# EAGLE board v1 (EAGLE 6.5.0)
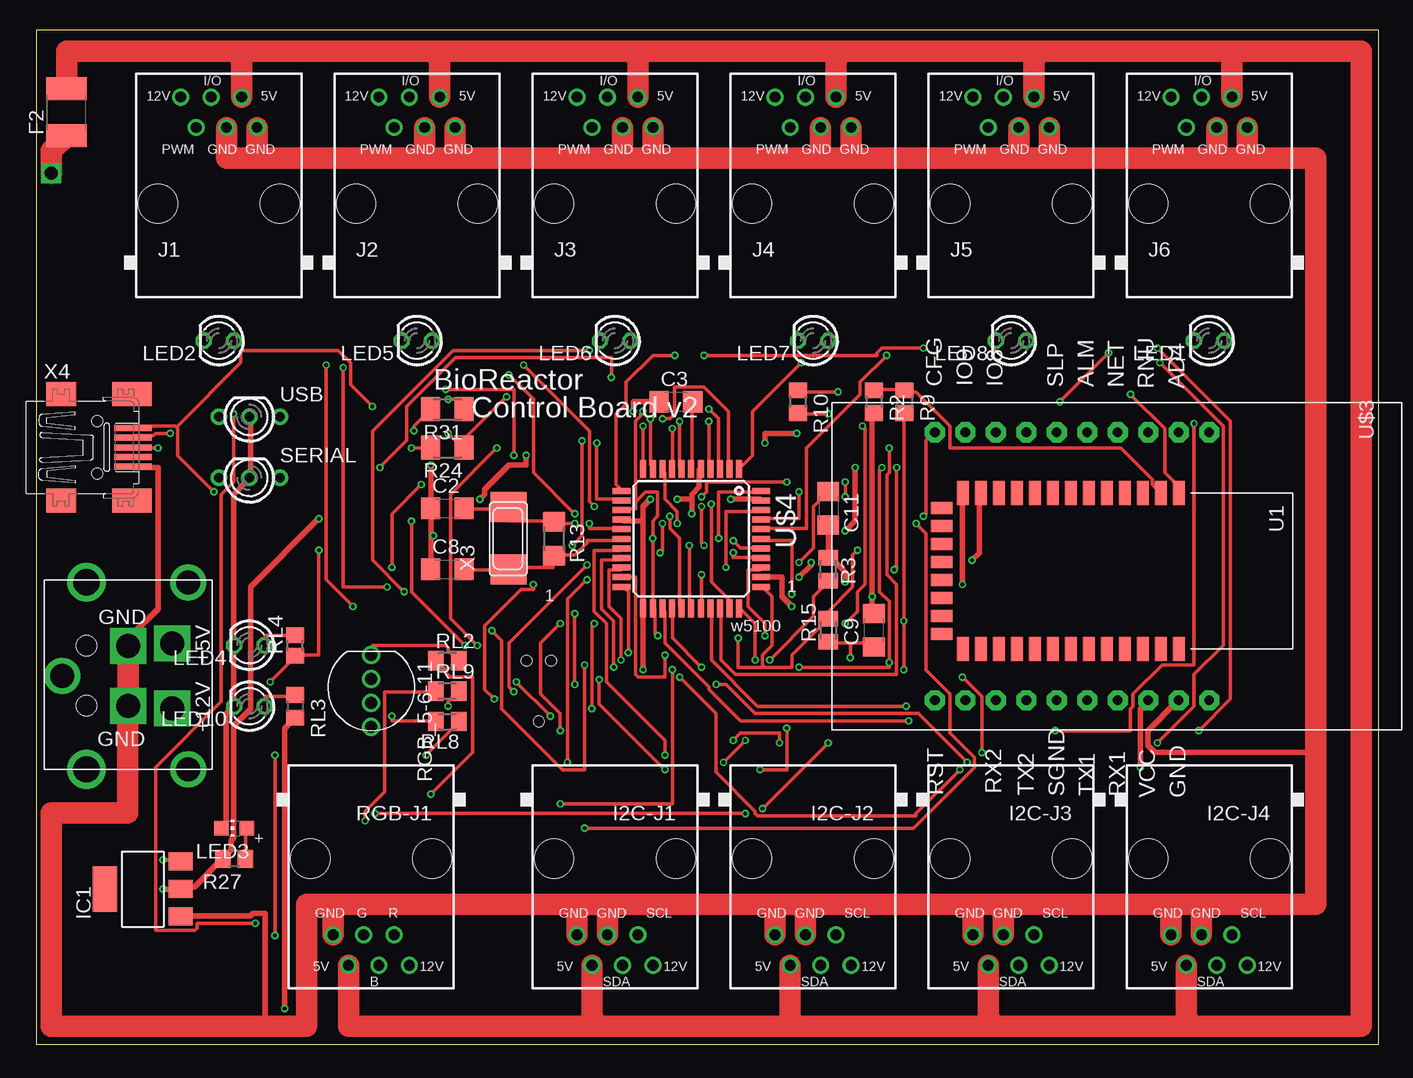
[diagram p0: board, top side]
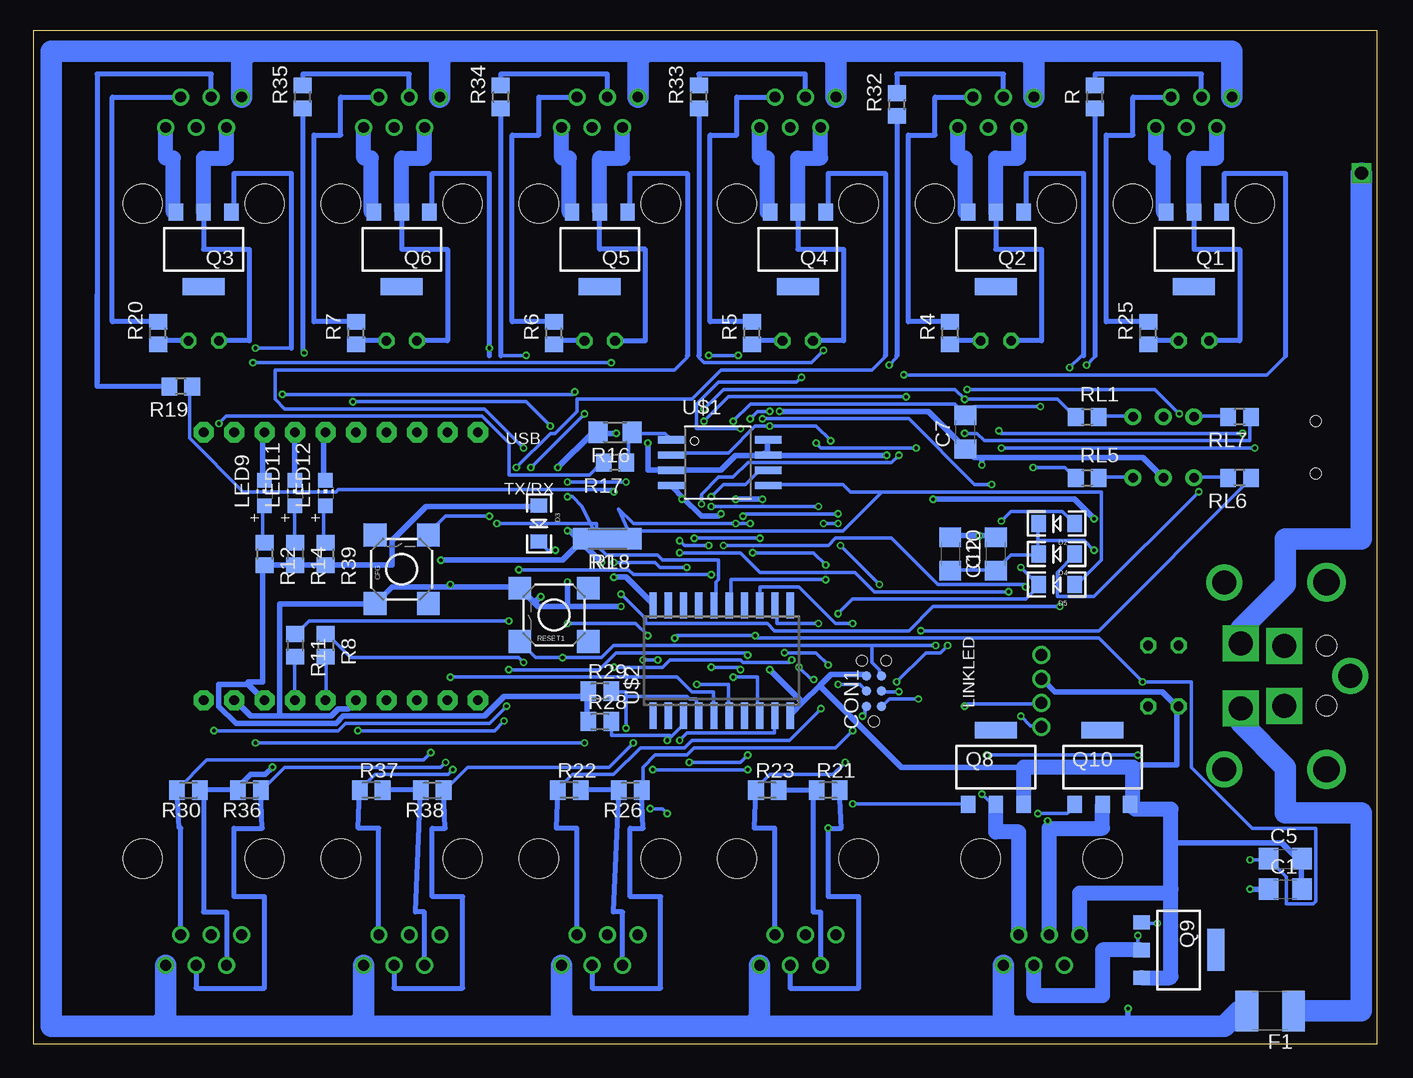
[diagram p1: board, bottom side, seen from below]

Size 111.94 x 84.57 mm. Coordinates in mm from the lower left corner, seen from the top.
Outline: 0,0 111.94,0 111.94,84.57 0,84.57 0,0
Copper layers (1*16): Top 0.035mm / dielectric 1.5mm / Bottom 0.035mm
Design rules "Fusion_eagle_rule_v1.1": minimum track width 6mil, minimum drill 12mil, track to track 6mil, track to pad 6mil, pad to pad 6mil, via to via 6mil, smd to smd 0mil, copper to edge 10mil, drill to drill 10mil, minimum pad ring 10mil, minimum via ring 6mil, stop-mask expansion 2mil, vias tented up to drill 100mil, thermal gap 10mil
Net classes: 0 default: width 0.305 mm; 1 power: width 0.457 mm; 2 VIN: width 0.457 mm; 3 fine: width 0.305 mm; 4 aref: width 0.305 mm
bKeepout: area -1.3,57.4 to 114.3,85.3; area -7.6,54.9 to 108,82.8
tRestrict: area -6.3,58.7 to 116.8,85.3; area 22.9,-4.8 to 118.1,16.8
bRestrict: area -6.3,58.7 to 116.8,85.3; area 22.9,-4.8 to 118.1,16.8
vRestrict: area 47,34.5 to 62.2,38.4; area 47,35.8 to 50.8,49.8; area 58.4,37.1 to 62.2,49.8; area 47,46 to 62.2,49.8; area 47,25.7 to 62.2,29.5

## Footprints (pad centres in the part's own frame; a part is rotated, then mirrored left to right if it is on the bottom)
C1206 = smd 1.6 x 1.8: 1 -1.4,0; 2 1.4,0
TACTILE_SWITCH_SMD = smd 1.905 x 1.905: 1 -2.857,2.223; 2 2.857,2.223; 3 -2.857,-2.223; 4 2.857,-2.223
TC2030-MCP-NL = smd 0.787 x 0.787: 5V 1.27,0.635; GND 3.81,0.635; MISO 1.27,-0.635; MOSI 2.54,0.635; RESET 3.81,-0.635; SCK 2.54,-0.635 | hole 0.889: 0,0; 5.08,-1.016; 5.08,1.016
LED-1206 = smd 1.2 x 1.4: A -1.5,0; C 1.5,0
C1812 = smd 1.9 x 3.4: 1 -1.95,0; 2 1.95,0
RJ12-STRAIGHT-I2C = drill 0.9 pad 1.4: +5V 1.905,8.89; +12V -3.175,8.89; GND1 3.175,6.35; GND2 0.635,6.35; SCL -1.905,6.35; SDA -0.635,8.89 | hole 3.251: -5.08,0; 5.08,0
SOT223 = smd 1.499 x 2.007: 1 -2.261,-3.15; 2 0.025,-3.15; 3 2.311,-3.15 | smd 3.81 x 2.007: 4 0,3.15
RJ12-STRAIGHT = drill 0.9 pad 1.4: +5V 1.905,8.89; +12V -3.175,8.89; GND1 3.175,6.35; GND2 0.635,6.35; I/O -0.635,8.89; PWM -1.905,6.35 | hole 3.251: -5.08,0; 5.08,0
LED3MM = drill 0.813 octagon: A -1.27,0; K 1.27,0
CHIP-LED0805 = smd 1.2 x 1.2: A 0,-1.05; C 0,1.05
PG-SOT-223 = smd 1.2 x 1.4: 1 -2.311,-3.099; 2 0,-3.099; 3 2.311,-3.099 | smd 3.5 x 1.4: 4 0,3.099
R0805 = smd 1.3 x 1.5: 1 -0.95,0; 2 0.95,0
R1206 = smd 1.6 x 1.803: 1 -1.422,0; 2 1.422,0
M0805 = smd 1.3 x 1.6: 1 -0.95,0; 2 0.95,0
M1206 = smd 1.6 x 2: 1 -1.4,0; 2 1.4,0
RJ12-STRAIGHT-RGB = drill 0.9 pad 1.4: +5V 1.905,8.89; +12V -3.175,8.89; B -0.635,8.89; G 0.635,6.35; GND1 3.175,6.35; R -1.905,6.35 | hole 3.251: -5.08,0; 5.08,0
LED-TRICOLOR-THROUGHHOLE = drill 1: BLU 3,0; GND -1,0; GRN 1,0; RED -3,0
R0805' = smd 1.3 x 1.5: 1 -0.85,0; 2 0.85,0
BICOLOR-3MM = drill 0.8 pad 1.4: 1 -2.54,0; 2 0,0; 3 2.54,0
BLUETOOTH_SMD = smd 2 x 1: 1 -6.35,3.81; 2 -6.35,2.31; 3 -6.35,0.81; 4 -6.35,-0.69; 5 -6.35,-2.19; 6 -6.35,-3.69; 7 -6.35,-5.19; 8 -6.35,-6.69; 9 -6.35,-8.19; 10 -6.35,-9.69; 11 -6.35,-11.19; 12 -6.35,-12.69; 13 -6.35,-14.19; 22 6.65,-14.19; 23 6.65,-12.69; 24 6.65,-11.19; 25 6.65,-9.69; 26 6.65,-8.19; 27 6.65,-6.69; 28 6.65,-5.19; 29 6.65,-3.69; 30 6.65,-2.19; 31 6.65,-0.69; 32 6.65,0.81; 33 6.65,2.31; 34 6.65,3.81 | smd 1 x 1.8: 14 -5.1,-15.94; 15 -3.6,-15.94; 16 -2.1,-15.94; 17 -0.6,-15.94; 18 0.9,-15.94; 19 2.4,-15.94; 20 3.9,-15.94; 21 5.4,-15.94
SOIC_8-LEAD = smd 0.61 x 2.21: CE -1.905,-2.934; RST/HOLD -0.635,5.156; SCK 0.635,5.156; SI 1.905,5.156; SO -0.635,-2.934; VDD -1.905,5.156; VSS 1.905,-2.934; WP 0.635,-2.934
SO20W = smd 0.6 x 2.2: 1 -5.715,-4.6; 2 -4.445,-4.6; 3 -3.175,-4.6; 4 -1.905,-4.6; 5 -0.635,-4.6; 6 0.635,-4.6; 7 1.905,-4.6; 8 3.175,-4.6; 9 4.445,-4.6; 10 5.715,-4.6; 11 5.715,4.6; 12 4.445,4.6; 13 3.175,4.6; 14 1.905,4.6; 15 0.635,4.6; 16 -0.635,4.6; 17 -1.905,4.6; 18 -3.175,4.6; 19 -4.445,4.6; 20 -5.715,4.6
SZ05-ZIGBEE = drill 0.8 pad 1.676 octagon: 6 -11.415,13.971; 7 -11.415,11.431; 11 -11.415,1.271; 12 -11.415,-1.269; 13 -11.415,-3.809; 14 -11.415,-6.349; 17 10.925,-6.349; 18 10.925,-3.809; 19 10.925,-1.269; 25 10.925,13.971; ALM -11.415,3.811; CFG -11.415,-8.889; GND 10.925,11.431; NET -11.415,6.351; RNU -11.415,8.891; RST 10.925,-8.889; RX1 10.925,6.351; SGND 10.925,1.271; TX1 10.925,3.811; VCC 10.925,8.891
TQFP44 = smd 1.5 x 0.5: 1 -5.8,4; 2 -5.8,3.2; 3 -5.8,2.4; 4 -5.8,1.6; 5 -5.8,0.8; 6 -5.8,0; 7 -5.8,-0.8; 8 -5.8,-1.6; 9 -5.8,-2.4; 10 -5.8,-3.2; 11 -5.8,-4; 23 5.8,-4; 24 5.8,-3.2; 25 5.8,-2.4; 26 5.8,-1.6; 27 5.8,-0.8; 28 5.8,0; 29 5.8,0.8; 30 5.8,1.6; 31 5.8,2.4; 32 5.8,3.2; 33 5.8,4 | smd 0.5 x 1.5: 12 -4,-5.8; 13 -3.2,-5.8; 14 -2.4,-5.8; 15 -1.6,-5.8; 16 -0.8,-5.8; 17 0,-5.8; 18 0.8,-5.8; 19 1.6,-5.8; 20 2.4,-5.8; 21 3.2,-5.8; 22 4,-5.8; 34 4,5.8; 35 3.2,5.8; 36 2.4,5.8; 37 1.6,5.8; 38 0.8,5.8; 39 0,5.8; 40 -0.8,5.8; 41 -1.6,5.8; 42 -2.4,5.8; 43 -3.2,5.8; 44 -4,5.8
KPJX-4S-S = drill 2 square: +5V 2.7,1.35; +12V -2.7,1.35; GND1 -2.5,5; GND2 2.5,5 | drill 2: P$1 -7.8,0; P$2 7.8,0; P$11 0,10.5 | drill 2.2: P$3 -7.8,8.5; P$4 7.8,8.5 | hole 1.7: -2.5,8.5; 2.5,8.5
NX6035 = smd 2.5 x 3: P$1 2.665,0; P$2 -2.565,0
32005-201 = smd 3.1 x 0.5: 1 3,1.6; 2 3,0.8; 3 3,0; 4 3,-0.8; 5 3,-1.6 | smd 2.5 x 2: M1 -3,-4.45; M2 -3,4.45 | smd 3.3 x 2: M3 2.9,4.45; M4 2.9,-4.45 | hole 0.9: 0,2.2; 0,-2.2

## Placement (x,y rotation side)
C1  10uF  [C1206]  7.62,12.95 0 bottom
C2  22pF  [C1206]  34.29,44.7 0 top
C3  100nF  [C1206]  53.34,53.59 0 top
C5  10uF  [C1206]  7.62,15.49 0 bottom
C7  10uF  [C1206]  34.29,51.05 90 bottom
C8  22pF  [C1206]  34.29,39.62 0 top
C9  100nF  [C1206]  69.85,34.54 90 top
C10  10uF  [C1206]  31.75,40.89 90 bottom
C11  100nF  [C1206]  66.04,44.7 270 top
C12  100nF  [C1206]  35.56,40.89 270 bottom
CFG  Configure  [TACTILE_SWITCH_SMD]  81.28,39.62 90 bottom
CON1  SPI  [TC2030-MCP-NL]  41.91,26.92 90 bottom
D2  1N581D1206  [LED-1206]  26.67,43.43 180 bottom
D3  1N581D1206  [LED-1206]  69.85,43.43 270 bottom
D4  1N581D1206  [LED-1206]  26.67,40.89 180 bottom
D5  1N581D1206  [LED-1206]  26.67,38.35 180 bottom
F1  0.5A  [C1812]  8.89,2.79 180 bottom
F2  0.5A  [C1812]  2.54,77.72 90 top
I2C-J1  RJ12STRAIGHT-I2C  [RJ12-STRAIGHT-I2C]  48.26,15.49 180 top
I2C-J2  RJ12STRAIGHT-I2C  [RJ12-STRAIGHT-I2C]  64.77,15.49 180 top
I2C-J3  RJ12STRAIGHT-I2C  [RJ12-STRAIGHT-I2C]  81.28,15.49 180 top
I2C-J4  RJ12STRAIGHT-I2C  [RJ12-STRAIGHT-I2C]  97.79,15.49 180 top
IC1  REG1117  [SOT223]  8.89,12.95 90 top
J1  RJ12  [RJ12-STRAIGHT]  15.24,70.1 0 top
J2  RJ12  [RJ12-STRAIGHT]  31.75,70.1 0 top
J3  RJ12  [RJ12-STRAIGHT]  48.26,70.1 0 top
J4  RJ12  [RJ12-STRAIGHT]  64.77,70.1 0 top
J5  RJ12  [RJ12-STRAIGHT]  81.28,70.1 0 top
J6  RJ12  [RJ12-STRAIGHT]  97.79,70.1 0 top
LED1  Blue  [LED3MM]  97.79,58.67 180 top
LED2  Blue  [LED3MM]  15.24,58.67 180 top
LED3  RED  [CHIP-LED0805]  16.51,18.03 90 top
LED4  RED  [LED3MM]  17.78,33.27 180 top
LED5  Blue  [LED3MM]  31.75,58.67 180 top
LED6  Blue  [LED3MM]  48.26,58.67 180 top
LED7  BLue  [LED3MM]  64.77,58.67 180 top
LED8  Blue  [LED3MM]  81.28,58.67 180 top
LED9  RED  [CHIP-LED0805]  92.71,45.97 0 bottom
LED10  RED  [LED3MM]  17.78,28.19 180 top
LED11  RED  [CHIP-LED0805]  90.17,45.97 0 bottom
LED12  RED  [CHIP-LED0805]  87.63,45.97 0 bottom
Q1  BSP75  [PG-SOT-223]  15.24,66.29 180 bottom
Q2  BSP75  [PG-SOT-223]  31.75,66.29 180 bottom
Q3  BSP75  [PG-SOT-223]  97.79,66.29 180 bottom
Q4  BSP75  [PG-SOT-223]  48.26,66.29 180 bottom
Q5  BSP75  [PG-SOT-223]  64.77,66.29 180 bottom
Q6  BSP75  [PG-SOT-223]  81.28,66.29 180 bottom
Q8  BSP75  [PG-SOT-223]  31.75,23.11 0 bottom
Q9  BSP75  [PG-SOT-223]  16.51,7.87 270 bottom
Q10  BSP75  [PG-SOT-223]  22.86,23.11 0 bottom
R  1k  [R0805]  23.5,78.99 90 bottom
R1  10k  [R1206]  64.77,42.16 180 bottom
R2  2.2K  [R0805]  69.85,53.59 270 top
R3  10k  [M0805]  66.04,39.62 270 top
R4  1k  [R0805]  35.56,59.31 90 bottom
R5  1k  [R0805]  52.07,59.31 90 bottom
R6  1k  [R0805]  68.58,59.31 90 bottom
R7  1k  [R0805]  85.09,59.31 90 bottom
R8  1K  [R0805]  87.63,33.27 270 bottom
R9  1.2K  [R0805]  72.39,53.59 270 top
R10  1K  [R0805]  63.5,53.59 270 top
R11  1K  [R0805]  90.17,33.27 270 bottom
R12  1K  [R0805]  92.71,40.89 270 bottom
R13  1M  [R1206]  43.18,42.16 270 top
R14  1K  [R0805]  90.17,40.89 270 bottom
R15  10k  [M0805]  66.04,34.54 90 top
R16  10k  [R1206]  63.5,51.05 180 bottom
R17  1k  [R0805]  63.5,48.51 180 bottom
R18  10k  [R1206]  63.5,42.16 180 bottom
R19  1k  [R0805]  99.69,54.86 180 bottom
R20  1k  [R0805]  101.6,59.31 90 bottom
R21  10K  [M0805]  45.72,21.21 0 bottom
R22  10K  [M0805]  67.31,21.21 0 bottom
R23  10K  [M0805]  50.8,21.21 0 bottom
R24  22  [M1206]  34.29,49.78 180 top
R25  1k  [R0805]  19.05,59.31 90 bottom
R26  10K  [M0805]  62.23,21.21 180 bottom
R27  1K  [R0805]  16.51,15.49 180 top
R28  10K  [M0805]  64.77,26.92 0 bottom
R29  10K  [M0805]  64.77,29.46 0 bottom
R30  10K  [M0805]  99.06,21.21 180 bottom
R31  22  [M1206]  34.29,52.96 180 top
R32  1k  [R0805]  40.01,78.36 90 bottom
R33  1k  [R0805]  56.52,78.99 90 bottom
R34  1k  [R0805]  73.03,78.99 90 bottom
R35  1k  [R0805]  89.53,78.99 90 bottom
R36  10K  [M0805]  93.98,21.21 180 bottom
R37  10K  [M0805]  83.82,21.21 0 bottom
R38  10K  [M0805]  78.74,21.21 180 bottom
R39  1K  [R0805]  87.63,40.89 270 bottom
RESET1  Reset uC  [TACTILE_SWITCH_SMD]  68.58,35.81 180 bottom
RGB-J1  RJ12  [RJ12-STRAIGHT-RGB]  27.94,15.49 180 top
RGB_5-6-11  [LED-TRICOLOR-THROUGHHOLE]  27.94,29.46 270 top
RL1  1K  [R0805]  24.13,52.32 0 bottom
RL2  1K  [M0805]  34.29,32 0 top
RL3  1K  [R0805]  21.59,28.19 270 top
RL4  1K  [R0805']  21.59,33.27 90 top
RL5  1K  [R0805]  24.13,47.24 0 bottom
RL6  1K  [R0805]  11.43,47.24 180 bottom
RL7  1K  [R0805]  11.43,52.32 180 bottom
RL8  1K  [M0805]  34.29,26.92 180 top
RL9  1K  [M0805]  34.29,29.46 0 top
SERIAL  BICOLOR-LED  [BICOLOR-3MM]  17.78,47.24 0 top
U1  HC_05  [BLUETOOTH_SMD]  91.44,39.62 270 top
U$1  SST25VF064C  [SOIC_8-LEAD]  55.88,48.51 270 bottom
U$2  PCA9518  [SO20W]  54.61,32 0 bottom
U$3  SZ05-ZIGBEE  [SZ05-ZIGBEE]  83.82,39.62 270 top
U$4  ATMEGA32U4-AU  [TQFP44]  54.61,42.16 270 top
U$6  KPJX-4S-S  [KPJX-4S-S]  12.7,30.73 90 top
USB  BICOLOR-LED  [BICOLOR-3MM]  17.78,52.32 0 top
X3  16MHz  [NX6035]  39.37,42.16 90 top
X4  MINI-USB  [32005-201]  5.08,49.78 0 top

## Library data of the parts
C1-C3 C5 C7-C12 R R1 R2 R4-R14 R16-R20 R25 R27 R32-R35 R39 RL1 RL3 RL5-RL7 = rcl
CFG CON1 D2-D5 F1 F2 I2C-J1-I2C-J4 J1-J6 LED1 LED2 LED4-LED8 LED10 RESET1 RGB-J1 RGB_5-6-11 SERIAL U$2 U$3 U$6 USB X3 = lpatiny
IC1 = burr-brown; MPN: REG1117; OC_FARNELL: 1097566; OC_NEWARK: 14P6981
LED3 LED9 LED11 LED12 U$4 = adafruit
Q1-Q6 Q8-Q10 = infineon; OC_FARNELL: unknown; OC_NEWARK: unknown
R3 R15 R21-R24 R26 R28-R31 R36-R38 RL2 RL4 RL8 RL9 = resistor
U1 = Bluetooth HC-05
U$1 = BertaLib
X4 = con-cypressindustries; OC_FARNELL: unknown; OC_NEWARK: unknown

## Nets
3.3V [power]: C1.1 IC1.2 R1.2 R16.2 R27.2 U1.12 U$1.RST/HOLD U$1.VDD U$1.WP U$2.20
+5V [power]: D3.A F2.2 I2C-J1.+5V I2C-J2.+5V I2C-J3.+5V I2C-J4.+5V J1.+5V J2.+5V J3.+5V J4.+5V J5.+5V J6.+5V R4.2 R5.2 R6.2 R7.2 R12.2 R14.2 R20.2 R21.1 R22.2 R23.2 R25.2 R26.2 R28.1 R29.1 R30.1 R36.2 R37.2 R38.2 R39.2 RGB-J1.+5V U$3.VCC
+5V/1 [fine]: C5.1 C10.1 C12.2 D2.C D3.C D4.C IC1.3 R15.2 RL4.1 U$4.2 U$4.14 U$4.24 U$4.34 U$4.44
+12V [power]: F1.2 I2C-J1.+12V I2C-J2.+12V I2C-J3.+12V I2C-J4.+12V J1.+12V J2.+12V J3.+12V J4.+12V J5.+12V J6.+12V RGB-J1.+12V RL3.2
A0: R35.1 U$4.36
A1: R33.1 U$4.37
A2: R32.1 U$4.38
A3: R.1 U$4.39
A4: R34.1 U$4.40
A5: R19.1 U$4.41
AREF: C11.1 U$4.42
CS: R17.2 U$4.25
D2B5: R2.1 R9.1 U1.2
D5*: Q5.1 U$4.31
D6*: Q1.1 U$4.27
D7*: Q10.1 U$4.1
D8*: Q2.1 U$4.28
D9*: Q4.1 U$4.29
D10*: Q3.1 U$4.30
D11*: Q6.1 U$4.12
D12*: Q8.1 U$4.26
D13*: Q9.1 U$4.32
D+USB: R24.2 X4.3
D-USB: R31.2 X4.2
FMOSI: D5.A R1.1 U$1.SI
GND [power]: C1.2 C2.1 C3.1 C5.2 C7.1 C8.1 C9.2 C10.2 C11.2 C12.1 CFG.1 CON1.GND I2C-J1.GND1 I2C-J1.GND2 I2C-J2.GND1 I2C-J2.GND2 I2C-J3.GND1 I2C-J3.GND2 I2C-J4.GND1 I2C-J4.GND2 IC1.1 J1.GND1 J1.GND2 J2.GND1 J2.GND2 J3.GND1 J3.GND2 J4.GND1 J4.GND2 J5.GND1 J5.GND2 J6.GND1 J6.GND2 LED3.C LED4.K LED10.K Q1.3 Q2.3 Q3.3 Q4.3 Q5.3 Q6.3 Q8.3 Q9.3 Q10.3 R2.2 R3.1 RESET1.4 RGB-J1.GND1 RGB_5-6-11.GND SERIAL.2 U1.13 U$1.VSS U$2.10 U$3.GND U$3.SGND U$4.5 U$4.15 U$4.23 U$4.35 U$4.43 U$6.GND1 U$6.GND2 USB.2 X4.5
GND1 [VIN]: LED9.C U$3.RNU
GND2 [VIN]: LED11.C U$3.NET
GND3 [VIN]: LED12.C U$3.ALM
HWB: R3.2 U$4.33
ISP+5V: CON1.5V D2.A
MISO: CON1.MISO U$1.SO U$4.11
MOSI: CON1.MOSI D5.C U$4.10
N$1: J3.PWM LED6.K Q4.2
N$2: J2.I/O R32.2
N$3: J6.I/O R19.2
N$4: LED5.A R4.1
N$5: J4.PWM LED7.K Q5.2
N$6 [aref]: Q10.2 RGB-J1.G RL9.1
N$7: J3.I/O R33.2
N$8: RL1.2 USB.3
N$9: LED1.A R20.1
N$10: R16.1 R17.1 U$1.CE
N$11: R11.2 U$3.RX1
N$12: LED4.A RL4.2
N$13: RL5.2 SERIAL.3
N$14: RL7.2 USB.1
N$15: RL6.2 SERIAL.1
N$16: C3.2 U$4.6
N$17: LED2.A R25.1
N$18: J1.I/O R.2
N$19: J5.PWM LED8.K Q6.2
N$20: LED3.A R27.1
N$21: J6.PWM LED1.K Q3.2
N$22: LED6.A R5.1
N$23: R18.2 U$1.SCK
N$24: R8.2 U$3.TX1
N$25: LED9.A R12.1
N$26: LED11.A R14.1
N$27: LED12.A R39.1
N$28: J2.PWM LED5.K Q2.2
N$29: J4.I/O R34.2
N$30: LED7.A R6.1
N$32: J5.I/O R35.2
N$33: LED8.A R7.1
N$34: J1.PWM LED2.K Q1.2
N$35: CFG.4 U$3.CFG
N$36: RGB_5-6-11.RED RL2.2
N$37: RGB_5-6-11.BLU RL8.2
N$38: F2.1 U$6.+5V
N$39: F1.1 U$6.+12V
N$40: RGB_5-6-11.GRN RL9.2
N$42: C8.2 R13.2 U$4.17 X3.P$2
N$50 [aref]: Q9.2 RGB-J1.B RL8.1
N$68 [aref]: Q8.2 RGB-J1.R RL2.1
N$70: R10.1 U1.1
N$75: LED10.A RL3.1
RD+: R24.1 RL7.1 U$4.4
RD-: R31.1 RL1.1 U$4.3
RESET: C9.1 CON1.RESET R15.1 RESET1.2 U$4.13
RX: R8.1 R10.2 U$4.20
RXLED: RL5.1 U$4.8
SCK: CON1.SCK R18.1 U$4.9
SCL: R28.2 U$2.3 U$4.18
SCL1: I2C-J4.SCL R30.2 U$2.5
SCL2: I2C-J3.SCL R37.1 U$2.8
SCL3: I2C-J2.SCL R22.1 U$2.12
SCL4: I2C-J1.SCL R23.1 U$2.15
SDA: R29.2 U$2.4 U$4.19
SDA1: I2C-J4.SDA R36.1 U$2.6
SDA2: I2C-J3.SDA R38.1 U$2.9
SDA3: I2C-J2.SDA R26.1 U$2.13
SDA4: I2C-J1.SDA R21.2 U$2.16
TX: R9.2 R11.1 U$4.21
TXLED: RL6.1 U$4.22
VUSB: C7.2 D4.A U$4.7 X4.1
XTAL1: C2.2 R13.1 U$4.16 X3.P$1

## Tracks (layer width: path | path; a pad name or v marks a point on that pad's centre or on a via)
3.3V  (via drill 0.3)
  Top 0.457: v78.03,40.39 78.64,41 78.64,45.87 U1.12 | v63.6,38.96 64.62,39.98 v64.62,40.18 | v10.57,12.95 11.99,12.95 IC1.2 12.19,13.16 13.21,13.16 15.44,15.39 R27.2 15.65,15.6 16.26,16.2 16.26,17.02 16.46,17.22 16.46,26.57 17.88,27.99 17.88,38.15 v23.57,43.84 | v63.4,50.95 60.76,50.95 v60.76,50.14 | v36.98,45.47 37.39,45.87 37.39,46.28 39.42,48.31 40.84,48.31 v40.84,49.12 | v67.46,42.82 68.28,43.64 v68.28,48.11
  Bottom 0.457: v78.03,40.39 67.87,40.39 66.24,42.01 R1.2 | v63.6,38.96 62.59,38.96 60.35,36.73 U$2.20 | v64.62,40.18 66.24,41.81 R1.2 | v10.57,12.95 9.14,12.95 C1.1 | U$1.RST/HOLD 50.8,49.33 50.8,50.34 U$1.VDD | v63.4,50.95 64.82,50.95 R16.2 65.02,50.95 65.43,50.95 v68.28,48.11 | v60.76,50.14 60.76,47.9 58.93,47.9 U$1.WP 58.73,47.9 54.66,47.9 53.44,49.12 51.21,49.12 51,49.33 U$1.RST/HOLD | v23.57,43.84 25.2,45.47 v36.98,45.47 | v40.84,49.12 50.6,49.12 U$1.RST/HOLD | v67.46,42.82 67.26,42.82 66.45,42.01 R1.2
+5V  (via drill 0.3)
  Top 0.457: v92.05,23.11 92.05,27.99 92.66,28.6 U$3.VCC
  Top 1.778: F2.2 2.54,82.8 16.51,82.8 | 16.51,82.8 33.02,82.8 | 33.02,82.8 49.53,82.8 | 49.53,82.8 67.31,82.8 | 67.31,82.8 83.82,82.8 | 83.82,82.8 100.33,82.8 | 100.33,82.8 110.49,82.8 110.49,1.52 96.52,1.52 | 96.52,1.52 80.01,1.52 | 80.01,1.52 63.5,1.52 | 63.5,1.52 46.99,1.52 | 46.99,1.52 26.04,1.52 RGB-J1.+5V | J1.+5V 17.14,82.17 16.51,82.8 | J2.+5V 33.66,82.17 33.02,82.8 | J3.+5V 50.16,82.17 49.53,82.8 | J4.+5V 66.67,82.17 67.31,82.8 | J5.+5V 83.19,82.17 83.82,82.8 | J6.+5V 99.69,82.17 100.33,82.8 | I2C-J1.+5V 46.35,2.16 46.99,1.52 | I2C-J2.+5V 62.87,2.16 63.5,1.52 | I2C-J3.+5V 79.38,2.16 80.01,1.52 | I2C-J4.+5V 95.89,2.16 96.52,1.52
  Bottom 0.406: I2C-J2.+5V 62.87,11.05 63.63,11.05 R26.2 R22.2 66.04,21.21 66.04,21.84 | I2C-J3.+5V 79.38,11.05 80.14,11.05 R38.2 R37.2 | I2C-J4.+5V 95.89,11.05 97.79,11.05 97.79,21.21 R30.1 R36.2 | R21.1 46.99,21.21 | I2C-J1.+5V 46.35,11.05 46.99,11.05 46.99,20.57 46.99,21.21 | R23.2 46.99,21.21 | R25.2 22.54,60.26 22.54,75.82 20.32,75.82 20.32,78.99 J1.+5V | R4.2 39.05,60.26 39.05,75.82 36.83,75.82 36.83,78.99 J2.+5V | R5.2 55.56,60.26 55.56,75.82 53.34,75.82 53.34,78.99 J3.+5V | R6.2 72.07,60.26 72.07,75.82 69.85,75.82 69.85,78.99 J4.+5V | R7.2 88.58,60.26 88.58,75.82 86.36,75.82 86.36,78.99 J5.+5V | R20.2 105.41,60.26 105.41,78.99 J6.+5V
  Bottom 0.457: D3.A 69.9,44.86 79.25,44.86 82.09,42.01 82.09,39.98 87.58,39.98 R39.2 87.78,39.98 90.02,39.98 R14.2 90.22,39.98 92.66,39.98 R12.2 92.86,39.78 92.86,30.23 94.08,30.23 94.08,30.02 | R28.1 65.84,26.98 65.84,29.41 R29.1 66.04,29.01 72.75,29.01 74.37,27.38 86.16,27.38 86.77,26.77 95.1,26.77 96.52,28.19 96.52,30.02 94.08,30.02 | 94.08,30.02 92.86,28.8 U$3.VCC | v92.05,23.11 92.66,22.5 93.88,22.5 95.1,21.29 R36.2
+5V/1  (via drill 0.3)
  Top 0.305: v68.48,41.2 68.07,40.79 68.07,38.15 66.04,36.12 66.04,35.51 | 60.66,31.55 60.76,31.45 62.99,31.45 62.99,32.46 66.04,35.51 | 60.66,31.55 60.55,31.65 60.55,32.46 61.37,33.27 61.37,37.34 60.55,38.15 U$4.34 | 66.04,35.51 R15.2 | 50.09,45.36 50.8,46.08 51.82,46.08 51.82,44.04 51.41,43.64 v51.41,42.21 51.41,36.52 U$4.24 51.61,36.32 51.61,34.29 v51.82,34.09 | 50.09,45.36 49.99,45.26 49.99,44.65 48.97,44.65 U$4.14 | v52.22,52.17 52.83,52.17 53.24,52.58 53.24,54.81 55.68,54.81 57.71,52.78 57.71,48.11 U$4.2 | v50.6,52.78 50.39,52.58 50.39,52.38 49.99,51.97 49.99,45.47 50.09,45.36 | v56.9,42.21 56.9,46.08 60.35,46.08 U$4.44 | v58.52,33.88 58.52,31.45 60.55,31.45 60.66,31.55 | v10.57,15.39 11.99,15.39 IC1.3 | v23.57,41.2 23.57,32.46 21.74,32.46 RL4.1 21.54,32.26 v19.51,30.23
  Bottom 0.305: v68.48,41.2 69.09,41.2 69.7,41.81 D3.C | v52.22,52.17 51.61,52.78 v50.6,52.78 | v51.41,42.21 v56.9,42.21 | v58.52,33.88 58.32,34.09 v51.82,34.09 51.61,33.88 23.16,33.88 v19.51,30.23 15.44,30.23 15.44,23.11 10.36,18.03 5.08,18.03 5.08,11.94 5.28,11.74 7.52,11.74 7.52,13.97 8.94,15.39 C5.1 9.14,15.39 v10.57,15.39 | C12.2 35.56,39.57 31.9,39.57 C10.1 31.7,39.57 30.48,40.79 28.25,40.79 D4.C 28.25,41 28.25,42.01 | 28.25,42.01 28.25,43.43 D2.C | v23.57,41.2 24.38,42.01 28.25,42.01
+12V  (via drill 0.3)
  Top 0.457: v20.73,3 20.73,26.37 21.54,27.18 RL3.2
  Bottom 0.457: v20.73,3 20.73,2.39 20.73,1.52
  Bottom 1.778: F1.2 11.43,2.79 12.7,1.52 20.73,1.52 30.48,1.52 | 30.48,1.52 52.07,1.52 | 52.07,1.52 67.31,1.52 | 67.31,1.52 85.09,1.52 | 85.09,1.52 101.6,1.52 | 101.6,1.52 110.49,1.52 110.49,82.8 93.98,82.8 | 93.98,82.8 77.47,82.8 | 77.47,82.8 60.96,82.8 | 60.96,82.8 45.72,82.8 | 45.72,82.8 29.21,82.8 | 29.21,82.8 12.06,82.8 J1.+12V | J3.+12V 45.09,82.17 45.72,82.8 | J4.+12V 61.59,82.17 60.96,82.8 | J5.+12V 78.11,82.17 77.47,82.8 | J6.+12V 94.61,82.17 93.98,82.8 | J2.+12V 28.57,82.17 29.21,82.8 | I2C-J4.+12V 100.97,2.16 101.6,1.52 | I2C-J3.+12V 84.45,2.16 85.09,1.52 | I2C-J2.+12V 67.94,2.16 67.31,1.52 | I2C-J1.+12V 51.44,2.16 52.07,1.52 | RGB-J1.+12V 31.11,2.16 30.48,1.52
A0  (via drill 0.3)
  Top 0.305: v60.76,34.09 60.76,35.1 59.33,36.52 59.33,39.57 60.35,39.57 U$4.36 | v67.46,35.1 68.48,36.12 68.48,37.74 69.09,38.35 69.09,51.36 v68.89,51.56 | v89.41,57.66 v85.34,53.59
  Bottom 0.305: v60.76,34.09 61.77,35.1 v67.46,35.1 | v68.89,51.56 70.92,53.59 v85.34,53.59 | v89.41,57.66 89.53,57.72
  Bottom 0.406: R35.1 89.53,57.72
A1  (via drill 0.3)
  Top 0.305: v58.12,41 58.12,40.59 60.35,40.59 U$4.37 | v30.68,37.74 28.04,40.39 28.04,51.16 34.75,57.86 v46.13,57.86
  Bottom 0.305: v58.12,41 53.03,41 51.41,39.37 43.48,39.37 41.86,37.74 v30.68,37.74 | v46.13,57.86 47.14,56.84 56.08,56.84 56.49,57.25 56.52,57.4
  Bottom 0.406: R33.1 56.52,57.4
A2  (via drill 0.3)
  Top 0.305: v58.12,42.01 58.73,41.4 60.35,41.4 U$4.38 | v55.68,41.6 55.47,41.81 v55.47,44.86 | v46.53,44.86 46.13,45.26 46.13,51.16 v40.64,56.64
  Bottom 0.305: v58.12,42.01 57.71,41.6 v55.68,41.6 | v46.53,44.86 v55.47,44.86 | v40.64,56.64 40.03,57.25 40.01,57.4
  Bottom 0.406: R32.1 40.01,57.4
A3  (via drill 0.3)
  Top 0.305: v62.99,37.54 62.99,42.01 60.55,42.01 U$4.39 | v26.42,36.52 24.18,38.76 v24.18,56.64
  Bottom 0.305: v62.99,37.54 60.96,35.51 60.96,35.1 50.8,35.1 50.19,34.49 39.01,34.49 36.98,36.52 v26.42,36.52 | v24.18,56.64 23.57,57.25 23.5,57.4
  Bottom 0.406: R.1 23.5,57.4
A4  (via drill 0.3)
  Top 0.305: v70.92,57.45 68.68,55.22 68.68,54.2 64.21,49.73 64.21,43.03 60.55,43.03 U$4.40
  Bottom 0.305: v70.92,57.45 72.95,57.45 73.03,57.45
  Bottom 0.406: R34.1 73.03,57.45 73.03,57.4
A5  (via drill 0.3)
  Top 0.305: v63.6,46.08 63.6,43.84 60.55,43.84 U$4.41
  Bottom 0.305: v63.6,46.08 63.8,46.28 86.56,46.28 86.77,46.08 94.49,46.08 98.96,50.55 98.96,54.81 98.75,54.81 R19.1
AREF  (via drill 0.3)
  Top 0.305: v57.51,39.78 57.51,44.45 60.35,44.45 U$4.42 | v63.6,40.18 64.82,41.4 64.82,44.86 66.04,46.08 C11.1
  Bottom 0.305: v57.51,39.78 59.74,39.78 60.15,40.18 v63.6,40.18
CS  (via drill 0.3)
  Top 0.305: v72.75,26.98 58.73,26.98 56.08,29.62 56.08,29.82 52.43,33.48 52.43,36.12 52.22,36.32 U$4.25 | v84.94,26.16 91.24,26.16 91.24,27.99 91.44,28.19 91.44,29.21 93.88,31.65 96.52,31.65 v96.52,51.76
  Bottom 0.305: v72.75,26.98 73.56,26.16 v84.94,26.16 | v96.52,51.76 95.91,52.38 74.57,52.38 72.34,50.14 72.34,47.5 65.63,47.5 64.62,48.51 R17.2
D2B5
  Top 0.305: R2.1 69.9,54.61 72.34,54.61 R9.1 72.54,54.41 73.36,54.41 76.2,51.56 76.2,49.73 90.42,49.73 93.07,47.09 93.07,46.68 93.67,46.08 U1.2
D5*  (via drill 0.3)
  Top 0.305: v71.12,49.73 71.12,47.7 70.92,47.5 70.92,39.17 71.73,38.35 71.73,30.84 58.32,30.84 57.1,32.05 57.1,36.32 U$4.31
  Bottom 0.305: v71.12,49.73 74.37,52.98 91.03,52.98 91.85,53.8 91.85,56.24 58.52,56.24 57.51,57.25 57.47,57.4
  Bottom 0.406: Q5.1 62.23,69.39 62.23,72.64 57.47,72.64 57.47,57.4
D6*  (via drill 0.3)
  Top 0.305: v52.83,44.04 52.83,43.03 53.65,42.21 53.65,36.52 U$4.27 | v44.91,44.25 41.45,47.7 41.45,53.8 v39.42,55.83
  Bottom 0.305: v52.83,44.04 52.63,44.25 v44.91,44.25 | v39.42,55.83 9.14,55.83 7.72,57.25 7.62,57.4
  Bottom 0.406: Q1.1 12.7,69.39 12.7,72.64 7.62,72.64 7.62,57.4
D7*  (via drill 0.3)
  Top 0.305: v59.13,19.25 v28.25,19.25 | v66.04,25.15 v60.55,19.66 | v93.47,25.15 96.52,28.19 96.52,30.84 98.96,33.27 98.96,51.56 v93.67,56.84 | v63.8,56.84 59.74,52.78 59.74,49.12 58.73,48.11 U$4.1
  Bottom 0.305: v28.25,19.25 25.81,19.25 25.2,19.86 Q10.1 | v59.13,19.25 59.54,19.66 v60.55,19.66 | v93.47,25.15 v66.04,25.15 | v63.8,56.84 v93.67,56.84
D8*  (via drill 0.3)
  Top 0.305: v54.46,41.6 54.46,36.52 U$4.28 | v29.26,38.15 25.6,38.15 v25.6,56.44
  Bottom 0.305: v54.46,41.6 45.72,41.6 45.11,42.21 40.44,42.21 36.58,38.35 29.46,38.35 v29.26,38.15 | v25.6,56.44 24.59,57.45 24.45,57.45
  Bottom 0.406: Q2.1 29.21,69.39 29.21,72.64 24.45,72.64 24.45,57.45 24.45,57.4
D9*  (via drill 0.3)
  Top 0.305: v55.47,39.17 55.47,36.52 U$4.29 | v71.53,39.57 71.73,39.78 v71.73,48.11
  Bottom 0.305: v55.47,39.17 61.98,39.17 62.38,39.57 v71.53,39.57 | v71.73,48.11 68.89,50.95 68.48,50.95 66.65,52.78 66.65,53.8 57.1,53.8 54.66,56.24 42.06,56.24 41.05,57.25 40.96,57.4
  Bottom 0.406: Q4.1 45.72,69.39 45.72,72.64 40.96,72.64 40.96,57.4
D10*  (via drill 0.3)
  Top 0.305: v72.54,28.19 60.15,28.19 56.29,32.05 56.29,36.32 U$4.30 | v96.93,26.16 99.57,28.8 99.57,51.97 v93.47,58.06
  Bottom 0.305: v72.54,28.19 73.97,26.77 85.95,26.77 86.56,26.16 v96.93,26.16 | v93.47,58.06 90.63,58.06 90.49,58.06
  Bottom 0.406: Q3.1 95.25,69.39 95.25,72.64 90.49,72.64 90.49,58.06 90.49,58.04
D11*  (via drill 0.3)
  Top 0.305: v53.24,57.45 51.41,57.45 49.17,55.22 49.17,53.39 48.36,52.58 48.36,46.68 48.77,46.28 U$4.12 | v55.68,57.45 70.1,57.45 70.1,57.66 70.51,58.06 v73.97,58.06
  Bottom 0.305: v55.68,57.45 v53.24,57.45 | v73.97,58.06 73.98,58.06
  Bottom 0.406: Q6.1 78.74,69.39 78.74,72.64 73.98,72.64 73.98,58.06 73.98,57.4
D12*  (via drill 0.3)
  Top 0.305: v43.69,20.07 53.03,20.07 v53.03,31.24 | v55.47,31.45 53.03,33.88 53.03,36.32 U$4.26
  Bottom 0.305: v43.69,20.07 34.14,20.07 Q8.1 | v53.03,31.24 53.24,31.45 v55.47,31.45
D13*  (via drill 0.3)
  Top 0.305: v18.29,10.11 13.41,10.11 13.41,9.7 13.21,9.5 9.96,9.5 9.96,23.11 15.44,28.6 15.44,45.87 16.46,46.89 v16.46,52.58 | v34.14,54.61 39.83,54.61 v39.83,49.12 | v56.29,45.06 56.29,38.56 57.71,37.13 57.71,36.52 U$4.32
  Bottom 0.305: v18.29,10.11 19.51,10.11 Q9.1 | v16.46,52.58 18.49,54.61 v34.14,54.61 | v39.83,49.12 40.44,48.51 52.43,48.51 53.65,47.29 54.86,47.29 56.29,45.87 v56.29,45.06
D+USB  (via drill 0.3)
  Top 0.305: v31.29,49.73 32.72,49.73 R24.2 | v10.16,49.73 8.13,49.73 X4.3
  Bottom 0.305: v10.16,49.73 v31.29,49.73
D-USB  (via drill 0.3)
  Top 0.305: v31.5,51.16 31.5,51.56 32.72,52.78 R31.2 | v11.18,50.95 9.96,50.95 9.75,50.75 8.13,50.75 X4.2
  Bottom 0.305: v31.5,51.16 31.29,50.95 v11.18,50.95
FMOSI
  Bottom 0.305: 41.25,46.08 43.89,46.08 44.5,46.68 50.6,46.68 U$1.SI | 41.25,46.08 22.96,46.08 22.96,40.39 24.99,38.35 D5.A | 41.25,46.08 44.5,42.82 62.59,42.82 63.2,42.21 R1.1
GND  (via drill 0.3)
  Top 0.457: R2.2 69.7,52.58 v69.7,37.34 69.7,36.12 C9.2 | C11.2 66.04,43.23 66.04,40.59 R3.1 66.24,40.59 67.46,39.37 v67.46,38.56 | v62.99,36.52 62.18,37.34 62.18,38.96 60.55,38.96 U$4.35 | v77.22,38.35 77.22,45.87 U1.13 | 32.92,42.42 32.92,44.65 C2.1 32.92,44.86 v32.92,48.31 | 32.92,42.42 32.92,39.78 C8.1 | v33.12,42.42 32.92,42.42 | v49.78,52.78 49.78,53.59 51.82,53.59 C3.1 | USB.2 17.88,52.17 17.88,47.29 SERIAL.2 17.68,47.09 16.46,45.87 16.46,33.48 LED4.K 16.46,33.27 16.46,28.4 LED10.K 16.46,28.19 15.85,27.58 15.85,18.24 15.65,18.03 LED3.C | v54.66,44.25 54.66,45.47 | 54.66,45.47 54.66,45.87 55.27,46.48 55.27,47.9 U$4.5 | v57.91,45.47 60.35,45.47 U$4.43 | 50.6,43.64 48.97,43.64 U$4.15 | 50.6,43.64 50.6,36.52 U$4.23 50.6,36.32 v50.6,31.24 | v53.44,45.47 54.46,45.47 54.66,45.47 | v51.21,45.47 50.6,44.86 50.6,43.84 50.6,43.64 | IC1.1 12.19,10.72 IC1.1 | IC1.1 12.39,10.72 17.88,10.72 18.09,10.92 19.1,10.92 19.1,2.39 19.1,1.52 | X4.5 8.13,48.11 10.16,48.11 10.16,36.32 7.92,34.09 U$6.GND2 | U$3.GND 95.1,28.6 92.66,26.16 92.66,24.94 93.27,24.33 105.87,24.33 106.68,24.33
  Top 1.778: 24.13,11.68 22.54,11.68 22.54,1.52 19.1,1.52 1.27,1.52 1.27,19.3 7.62,19.3 7.62,28.15 U$6.GND1 U$6.GND2 | 24.13,11.68 45.72,11.68 | 45.72,11.68 46.99,11.68 | 46.99,11.68 62.23,11.68 | 62.23,11.68 63.5,11.68 | 63.5,11.68 78.74,11.68 | 78.74,11.68 80.01,11.68 | 80.01,11.68 95.25,11.68 | 95.25,11.68 97.79,11.68 | 97.79,11.68 106.68,11.68 106.68,24.33 106.68,73.91 100.33,73.91 | 100.33,73.91 99.06,73.91 | 99.06,73.91 85.09,73.91 | 85.09,73.91 81.28,73.91 | 81.28,73.91 68.58,73.91 | 68.58,73.91 65.28,73.91 64.77,73.91 | 64.77,73.91 51.56,73.91 50.8,73.91 | 50.8,73.91 48.77,73.91 48.26,73.91 | 48.26,73.91 35.56,73.91 | 35.56,73.91 35.05,73.91 31.75,73.91 | 31.75,73.91 18.54,73.91 17.78,73.91 | 17.78,73.91 15.88,73.91 J1.GND2 | J1.GND1 18.41,74.55 17.78,73.91 | J2.GND2 32.38,74.55 31.75,73.91 | J2.GND1 34.92,74.55 35.56,73.91 | J3.GND2 48.9,74.55 48.26,73.91 | J3.GND1 51.44,74.55 50.8,73.91 | J4.GND2 65.41,74.55 64.77,73.91 | J4.GND1 67.94,74.55 68.58,73.91 | J5.GND2 81.92,74.55 81.28,73.91 | J5.GND1 84.45,74.55 85.09,73.91 | J6.GND2 98.42,74.55 99.06,73.91 | J6.GND1 100.97,74.55 100.33,73.91 | RGB-J1.GND1 24.77,11.05 24.13,11.68 | I2C-J1.GND1 45.09,11.05 45.72,11.68 | I2C-J1.GND2 47.62,11.05 46.99,11.68 | I2C-J2.GND1 61.59,11.05 62.23,11.68 | I2C-J2.GND2 64.14,11.05 63.5,11.68 | I2C-J3.GND1 78.11,11.05 78.74,11.68 | I2C-J3.GND2 80.64,11.05 80.01,11.68 | I2C-J4.GND1 94.61,11.05 95.25,11.68 | I2C-J4.GND2 97.16,11.05 97.79,11.68
  Bottom 0.457: 91.44,27.38 93.88,27.38 95.1,28.6 U$3.GND | 91.44,27.38 87.17,27.38 86.56,27.99 85.75,27.99 85.14,28.6 U$3.SGND | 67.46,36.52 69.9,36.52 70.21,36.83 | 67.46,36.52 v62.99,36.52 | 70.21,36.83 71.32,37.95 RESET1.4 71.53,38.15 77.22,38.15 | 77.22,38.15 82.09,38.15 83.31,36.93 CFG.1 83.72,36.73 91.44,36.73 91.44,27.58 91.44,27.38 | v77.22,38.35 77.22,38.15 | v67.46,38.56 67.46,36.73 67.46,36.52 | v69.7,37.34 70.1,36.93 70.21,36.83 | C10.2 31.9,42.42 v33.12,42.42 35.56,42.42 C12.1 | 32.92,48.92 19.51,48.92 17.88,47.29 SERIAL.2 | 32.92,48.92 33.53,48.92 34.14,49.53 C7.1 34.34,49.73 37.39,52.78 v49.78,52.78 | v32.92,48.31 32.92,48.72 32.92,48.92 | RGB_5-6-11.GND 27.84,30.43 26.82,29.41 17.88,29.41 16.66,28.19 LED10.K 16.66,27.99 16.66,23.32 19.91,23.32 20.32,23.11 | v54.66,44.25 54.86,44.04 56.29,44.04 57.81,45.57 | 57.81,45.57 58.73,46.48 U$1.VSS | v57.91,45.47 57.81,45.57 | v51.21,45.47 v53.44,45.47 | 47.85,28.5 48.77,27.58 U$2.10 | 47.85,28.5 46.43,29.92 | 46.43,29.92 45.52,30.84 42.67,30.84 CON1.GND | U$2.10 48.97,27.38 U$2.10 | C1.2 6.3,12.95 6.3,15.39 C5.2 6.5,15.39 7.92,16.82 16.66,16.82 17.14,16.82 | 46.43,29.92 46.33,29.82 39.62,23.11 30.07,23.11 29.44,23.11 | v50.6,31.24 47.95,28.6 47.85,28.5
  Bottom 1.27: Q2.3 34.29,69.39 34.29,73.91 34.92,73.91 J2.GND1 | Q4.3 50.8,69.39 50.8,73.91 51.44,73.91 J3.GND1 | Q5.3 67.31,69.39 67.31,73.91 67.94,73.91 J4.GND1 | Q6.3 83.82,69.39 83.82,73.91 84.45,73.91 J5.GND1 | Q3.3 100.33,69.39 100.33,73.91 100.97,73.91 J6.GND1 | Q1.3 17.78,69.39 17.78,73.91 18.41,73.91 J1.GND1 | Q8.3 29.44,23.11 20.32,23.11 20.32,20.02 Q10.3 20.16,19.62 17.14,19.62 17.14,16.82 17.14,12.95 | Q9.3 17.23,5.56 17.14,5.65 17.14,12.95 | RGB-J1.GND1 24.77,12.64 17.46,12.64 17.14,12.95
GND1
  Bottom 0.457: LED9.C 92.86,47.09 92.86,50.95 U$3.RNU
GND2
  Bottom 0.457: LED11.C 90.22,47.09 90.22,50.95 U$3.NET
GND3
  Bottom 0.457: LED12.C 87.78,47.09 87.78,50.95 U$3.ALM
HWB  (via drill 0.3)
  Top 0.305: v59.94,32.05 59.94,35.1 58.73,36.32 U$4.33 | v61.16,32.05 64.82,35.71 64.82,37.34 66.04,38.56 R3.2
  Bottom 0.305: v61.16,32.05 v59.94,32.05
ISP+5V  (via drill 0.3)
  Top 0.305: v40.03,30.23 v42.88,27.38 | v35.76,33.27 31.29,37.74 v31.29,43.64
  Bottom 0.305: v42.88,27.38 42.67,27.38 42.67,28.19 CON1.5V | v40.03,30.23 37.59,32.66 36.37,32.66 v35.76,33.27 | v31.29,43.64 30.48,44.45 26.21,44.45 25.2,43.43 D2.A
MISO  (via drill 0.3)
  Top 0.305: v38.2,28.8 37.39,29.62 37.39,34.9 40.44,37.95 41.45,37.95 v41.45,38.35 | v44.7,41.6 45.52,42.42 v45.52,50.34 | v50.6,51.56 50.6,48.11 U$4.11
  Bottom 0.305: v38.2,28.8 40.64,28.8 41.25,28.19 CON1.MISO | v44.7,41.6 v41.45,38.35 | v45.52,50.34 46.74,51.56 v50.6,51.56 51.82,51.56 54.05,49.33 58.73,49.33 U$1.SO
MOSI  (via drill 0.3)
  Top 0.305: v44.91,35.92 v44.91,30.02 | v51.21,52.17 51.21,48.31 51.41,48.11 U$4.10 | v32.11,46.68 29.67,44.25 v29.67,39.78
  Bottom 0.305: v44.91,30.02 43.08,30.02 42.67,29.62 CON1.MOSI | v44.91,35.92 43.69,37.13 29.26,37.13 28.04,38.35 D5.C 28.25,38.35 v29.67,39.78 | v51.21,52.17 39.01,52.17 33.53,46.68 v32.11,46.68
N$1
  Bottom 0.406: Q4.2 48.26,66.29 44.45,66.29 44.45,58.67 LED6.K
  Bottom 1.27: Q4.2 48.26,73.91 46.35,73.91 J3.PWM
N$2
  Bottom 0.406: J2.I/O 31.11,80.9 40.01,80.9 R32.2
N$3
  Bottom 0.406: J6.I/O 97.16,80.9 106.68,80.9 106.68,62.48 | 106.68,62.48 106.68,56.13 | 106.68,56.13 106.68,55.18 | 106.68,55.18 106.68,56.13 | 106.68,56.13 106.68,62.48 | 106.68,55.18 106.68,56.13 | 106.68,56.13 106.68,62.48 | R19.2 106.68,54.86 106.68,56.13
N$4
  Bottom 0.406: LED5.A 35.56,58.67 R4.1
N$5
  Bottom 0.406: LED7.K 60.96,58.67 60.96,66.29 64.77,66.29 Q5.2
  Bottom 1.27: Q5.2 64.77,73.91 62.87,73.91 J4.PWM
N$6  (via drill 0.3)
  Top 0.305: v27.43,18.64 27.43,19.46 29.06,21.08 29.06,29.41 33.33,29.41 RL9.1
  Bottom 0.305: v27.43,18.64 27.3,18.03
  Bottom 1.27: RGB-J1.G 27.3,18.03 22.86,18.03 Q10.2
N$7
  Bottom 0.406: J3.I/O 47.62,80.9 56.52,80.9 R33.2
N$8
  Bottom 0.305: RL1.2 23.16,52.38 20.32,52.38 USB.3
N$9
  Bottom 0.406: LED1.A 101.6,58.67 R20.1
N$10
  Bottom 0.305: R17.1 62.38,48.51 62.38,50.95 62.18,50.95 R16.1 61.98,50.95 59.33,50.95 58.93,50.55 U$1.CE
N$11
  Bottom 0.305: R11.2 90.22,32.26 90.22,28.8 U$3.RX1
N$12
  Top 0.305: RL4.2 21.54,34.09 19.1,34.09 19.1,33.27 LED4.A
N$13
  Bottom 0.305: RL5.2 23.16,47.29 20.32,47.29 SERIAL.3
N$14
  Bottom 0.305: RL7.2 12.39,52.38 15.24,52.38 USB.1
N$15
  Bottom 0.305: RL6.2 12.39,47.29 15.24,47.29 SERIAL.1
N$16
  Top 0.305: U$4.6 54.66,48.11 54.66,53.59 C3.2
N$17
  Bottom 0.406: LED2.A 19.05,58.67 R25.1
N$18
  Bottom 0.406: J1.I/O 14.61,80.9 23.5,80.9 R.2
N$19
  Bottom 0.406: Q6.2 81.28,66.29 77.47,66.29 77.47,58.67 LED8.K
  Bottom 1.27: Q6.2 81.28,73.91 79.38,73.91 J5.PWM
N$20
  Top 0.305: LED3.A 17.48,18.03 17.48,15.6 R27.1
N$21
  Bottom 0.406: Q3.2 97.79,66.29 93.98,66.29 93.98,58.67 LED1.K
  Bottom 1.27: Q3.2 97.79,73.91 95.89,73.91 J6.PWM
N$22
  Bottom 0.406: LED6.A 52.07,58.67 R5.1
N$23  (via drill 0.3)
  Top 0.305: v67.46,46.89 v67.46,45.67 | v62.59,46.89 55.88,46.89 55.88,46.08 v55.47,45.67
  Bottom 0.305: v67.46,45.67 67.06,45.67 66.24,44.86 R18.2 | v62.59,46.89 v67.46,46.89 | v55.47,45.67 54.46,46.68 52.63,46.68 51.61,47.7 50.8,47.7 U$1.SCK
N$24
  Bottom 0.305: R8.2 87.58,32.26 87.58,28.8 U$3.TX1
N$25
  Bottom 0.305: LED9.A 92.86,44.86 92.86,42.01 R12.1
N$26
  Bottom 0.305: LED11.A 90.22,44.86 90.22,42.01 R14.1
N$27
  Bottom 0.305: LED12.A 87.78,44.86 87.78,42.01 R39.1
N$28
  Bottom 0.406: Q2.2 31.75,66.29 27.94,66.29 27.94,58.67 LED5.K
  Bottom 1.27: Q2.2 31.75,73.91 29.84,73.91 J2.PWM
N$29
  Bottom 0.406: J4.I/O 64.14,80.9 73.03,80.9 R34.2
N$30
  Bottom 0.406: LED7.A 68.58,58.67 R6.1
N$32
  Bottom 0.406: J5.I/O 80.64,80.9 89.53,80.9 R35.2
N$33
  Bottom 0.406: LED8.A 85.09,58.67 R7.1
N$34
  Bottom 0.406: Q1.2 15.24,66.29 11.43,66.29 11.43,58.67 LED2.K
  Bottom 1.27: Q1.2 15.24,73.91 13.34,73.91 J1.PWM
N$35  (via drill 0.3)
  Top 0.305: v73.97,44.04 74.17,44.25 74.17,50.34 74.78,50.95 U$3.CFG
  Bottom 0.305: v73.97,44.04 77.62,44.04 79.05,42.62 CFG.4
N$36
  Top 0.305: RL2.2 35.15,32.05 34.34,32.87 34.34,33.07 34.14,33.27 28.04,33.27 28.04,32.66 RGB_5-6-11.RED
N$37  (via drill 0.3)
  Top 0.305: v29.67,27.38 29.67,26.98 33.33,26.98 RL8.2
  Bottom 0.305: v29.67,27.38 28.85,26.57 28.04,26.57 RGB_5-6-11.BLU
N$38  (via drill 1.1)
  Top 1.778: v1.27,72.64 1.27,74.5 F2.1
  Bottom 1.778: U$6.+5V 11.35,34.62 7.62,38.35 7.62,42.16 1.27,42.16 v1.27,72.64
N$39
  Bottom 1.778: U$6.+12V 11.35,26.84 7.62,23.11 7.62,19.3 1.27,19.3 1.27,2.79 5.08,2.79 F1.1
N$40  (via drill 0.3)
  Top 0.305: v34.34,28.19 34.34,28.6 35.15,29.41 RL9.2
  Bottom 0.305: v34.34,28.19 34.14,28.4 28.04,28.4 RGB_5-6-11.GRN
N$42
  Top 0.305: C8.2 35.76,39.57 39.22,39.57 X3.P$2 39.42,39.78 43.08,39.78 43.08,40.59 R13.2 43.28,40.79 44.91,40.79 45.92,41.81 45.92,42.01 48.77,42.01 U$4.17
N$50  (via drill 0.3)
  Top 0.305: v32.51,24.13 35.15,26.77 RL8.1 | v19.91,9.09 v19.91,24.13
  Bottom 0.305: v19.91,24.13 v32.51,24.13 | v19.91,9.09 19.91,8.48 19.91,7.87
  Bottom 1.27: Q9.2 19.91,7.87 22.86,7.87 22.86,4.06 28.57,4.06 RGB-J1.B
N$68  (via drill 0.3)
  Top 0.305: v32.92,20.88 36.37,24.33 36.37,30.63 34.54,30.63 34.14,31.04 34.14,31.24 33.53,31.85 RL2.1
  Bottom 0.305: v32.92,20.88 32.31,20.27 Q8.2
  Bottom 1.27: RGB-J1.R 29.84,17.72 31.75,17.72 Q8.2
N$70  (via drill 0.3)
  Top 0.305: v66.85,54.41 63.6,54.41 R10.1 | v91.24,54.2 94.08,51.36 94.08,47.7 95.1,46.68 95.1,46.08 U1.1
  Bottom 0.305: v66.85,54.41 67.06,54.2 v91.24,54.2
N$75
  Top 0.305: RL3.1 21.54,29.01 19.1,29.01 19.1,28.19 LED10.A
RD+  (via drill 0.3)
  Top 0.305: v34.34,50.95 35.56,49.73 R24.1 35.36,50.14 v39.22,54 | v56.08,51.97 56.08,48.11 U$4.4
  Bottom 0.305: v34.34,50.95 33.33,50.95 32.72,50.34 10.57,50.34 10.57,52.17 RL7.1 | v56.08,51.97 54.05,54 v39.22,54
RD-  (via drill 0.3)
  Top 0.305: v34.34,53.8 35.56,53.8 35.56,52.98 R31.1 | v56.08,52.98 56.9,52.17 56.9,48.11 U$4.3
  Bottom 0.305: RL1.1 25.2,52.38 26.62,53.8 v34.34,53.8 35.15,54.61 54.46,54.61 v56.08,52.98
RESET  (via drill 0.3)
  Top 0.305: 67.87,33.48 69.7,33.48 69.7,33.27 C9.1 | 67.87,33.48 66.04,33.48 R15.1 | v46.74,50.14 46.74,45.47 48.77,45.47 U$4.13 | v38.41,49.73 34.54,45.87 34.54,35.51 v36.78,33.27 | v67.87,32.26 67.87,33.48
  Bottom 0.305: 42.06,33.27 42.06,31.85 41.45,31.24 41.45,30.84 CON1.RESET | 42.06,33.27 63.6,33.27 64.62,32.26 v67.87,32.26 70.1,32.26 71.32,33.48 RESET1.2 | v46.74,50.14 46.33,49.73 v38.41,49.73 | 42.06,33.27 v36.78,33.27
RX  (via drill 0.3)
  Top 0.305: v48.77,32.05 48.77,35.51 47.75,36.52 47.75,39.57 48.77,39.57 U$4.20 | v63.6,31.45 71.12,31.45 v71.12,31.85 71.12,36.93 70.31,37.74 70.31,47.9 v70.51,48.11 | v66.04,52.58 63.6,52.58 R10.2
  Bottom 0.305: v48.77,32.05 48.97,31.85 52.83,31.85 53.03,32.05 58.93,32.05 59.54,31.45 v63.6,31.45 | v71.12,31.85 71.53,32.26 85.55,32.26 87.38,34.09 87.58,34.09 R8.1 | v70.51,48.11 v66.04,52.58
RXLED  (via drill 0.3)
  Top 0.305: v28.65,48.11 30.89,50.34 30.89,53.19 34.95,57.25 47.95,57.25 v47.95,55.63 | v53.03,51.36 53.03,48.11 U$4.8
  Bottom 0.305: v28.65,48.11 26.01,48.11 25.2,47.29 RL5.1 | v47.95,55.63 48.36,55.22 54.86,55.22 56.69,53.39 56.69,51.36 v53.03,51.36
SCK  (via drill 0.3)
  Top 0.305: v39.83,29.41 39.42,29.82 39.42,33.48 v45.92,39.98 | v52.02,41 52.22,41.2 v52.22,43.43 | v53.44,43.43 53.44,44.45 52.43,45.47 52.43,47.7 52.22,47.9 U$4.9
  Bottom 0.305: v39.83,29.41 41.25,29.41 CON1.SCK | v45.92,39.98 46.94,41 v52.02,41 | v52.22,43.43 v53.44,43.43 61.98,43.43 63.2,44.65 R18.1
SCL  (via drill 0.3)
  Top 0.305: v52.43,24.13 52.43,25.35 47.55,30.23 47.55,35.1 46.53,36.12 46.53,41.2 48.77,41.2 U$4.18 | v59.13,25.35 v57.3,23.52
  Bottom 0.305: v52.43,24.13 53.03,23.52 v57.3,23.52 | 58.83,25.65 57.91,26.57 57.91,27.38 U$2.3 | 58.83,25.65 v59.13,25.35 | R28.2 63.8,26.77 63.8,25.76 58.93,25.76 58.83,25.65
SCL1  (via drill 0.3)
  Top 0.305: v77.22,30.63 78.84,29.01 v78.84,24.33
  Bottom 0.305: v77.22,30.63 58.32,30.63 57.1,29.41 55.27,29.41 55.27,27.58 U$2.5 | v78.84,24.33 79.45,23.72 97.54,23.72 99.97,21.29 R30.2
  Bottom 0.406: I2C-J4.SCL 99.69,18.03 99.83,18.03 R30.2
SCL2  (via drill 0.3)
  Top 0.305: v53.65,30.63 56.69,27.58 56.69,22.71 59.94,19.46 59.94,19.25 60.15,19.05 73.36,19.05 73.36,19.25 v77.01,22.91
  Bottom 0.305: v53.65,30.63 51.61,30.63 51.61,27.58 U$2.8 | v77.01,22.91 77.42,22.5 83.52,22.5 84.73,21.29 R37.1
  Bottom 0.406: I2C-J3.SCL 83.19,18.03 84.9,18.03 R37.1
SCL3  (via drill 0.3)
  Top 0.305: v46.53,35.1 46.33,34.9 v46.33,27.99
  Bottom 0.305: v46.53,35.1 49.99,35.1 49.99,36.52 U$2.12 | v46.33,27.99 48.97,25.35 57.1,25.35 57.71,24.74 61.37,24.74 63.6,22.5 67.06,22.5 68.28,21.29 R22.1
  Bottom 0.406: I2C-J2.SCL 66.67,18.03 68.39,18.03 R22.1
SCL4  (via drill 0.3)
  Top 0.305: v45.92,38.76 44.3,37.13 v44.3,23.52
  Bottom 0.305: v45.92,38.76 53.85,38.76 53.85,36.73 U$2.15 | v44.3,23.52 45.31,22.5 50.6,22.5 51.82,21.29 R23.1
  Bottom 0.406: I2C-J1.SCL 50.16,18.03 51.88,18.03 R23.1
SDA  (via drill 0.3)
  Top 0.305: v48.16,31.45 48.16,35.31 47.14,36.32 47.14,40.39 48.77,40.39 U$4.19 | v46.94,30.43 46.94,28.4 v52.43,22.91 | v60.35,22.91 62.59,22.91 v62.59,26.37
  Bottom 0.305: v48.16,31.45 47.14,30.43 v46.94,30.43 | v60.35,22.91 v52.43,22.91 | 62.59,29.01 62.59,29.41 63.8,29.41 R29.2 | 62.59,29.01 v62.59,26.37 | 62.59,29.01 57.51,29.01 57.3,28.8 56.69,28.8 56.69,27.58 U$2.4
SDA1  (via drill 0.3)
  Top 0.305: v56.69,30.02 57.51,30.02 59.94,27.58 73.56,27.58 v77.62,23.52
  Bottom 0.305: v56.69,30.02 54.05,30.02 54.05,27.58 U$2.6 | v77.62,23.52 78.03,23.11 91.03,23.11 92.86,21.29 R36.1
  Bottom 0.406: I2C-J4.SDA 98.42,4.7 92.71,4.7 92.71,12.32 95.25,12.32 95.25,18.03 92.9,18.03 R36.1
SDA2  (via drill 0.3)
  Top 0.305: v58.12,25.35 58.73,25.96 61.98,25.96 v61.98,25.15
  Bottom 0.305: v58.12,25.35 57.51,25.96 50.19,25.96 50.19,27.38 U$2.9 | v61.98,25.15 64.01,23.11 75.79,23.11 77.62,21.29 R38.1
  Bottom 0.406: I2C-J3.SDA 81.92,4.7 76.2,4.7 76.2,12.32 78.74,12.32 78.74,18.03 77.66,18.03 R38.1
SDA3  (via drill 0.3)
  Top 0.305: v43.69,35.1 42.06,33.48 42.06,29.21 43.69,27.58 v43.69,26.16
  Bottom 0.305: v43.69,35.1 45.11,35.1 48.16,38.15 51.41,38.15 51.41,36.73 U$2.13 | v43.69,26.16 45.11,24.74 56.9,24.74 57.51,24.13 60.15,24.13 61.16,23.11 61.16,21.29 R26.1
  Bottom 0.406: I2C-J2.SDA 65.41,4.7 59.69,4.7 59.69,12.32 62.23,12.32 62.23,18.03 61.15,18.03 R26.1
SDA4  (via drill 0.3)
  Top 0.305: v73.36,43.43 74.17,42.62 74.17,31.24 76.2,29.21 76.2,25.96 78.23,23.93 78.23,23.11 73.15,18.03 v45.72,18.03
  Bottom 0.305: v73.36,43.43 65.02,43.43 65.02,41.6 64.21,40.79 59.94,40.79 59.54,40.39 54.86,40.39 54.86,38.76 55.07,38.56 55.07,36.73 U$2.16
  Bottom 0.406: I2C-J1.SDA 48.9,4.7 43.18,4.7 43.18,12.32 45.72,12.32 v45.72,18.03 44.64,18.03 R21.2
TX  (via drill 0.3)
  Top 0.305: v52.43,32.46 52.43,30.63 50.19,30.63 49.99,30.84 49.99,38.96 48.97,38.96 U$4.21 | v72.34,31.24 v72.34,35.31 72.34,52.58 R9.2
  Bottom 0.305: v52.43,32.46 52.63,32.66 63.4,32.66 64.82,31.24 v72.34,31.24 | v72.34,35.31 89,35.31 90.02,34.29 R11.1
TXLED  (via drill 0.3)
  Top 0.305: v38,34.49 38.81,33.68 38.81,27.99 43.89,22.91 45.72,22.91 v45.72,31.65 | v49.38,32.66 49.38,37.74 48.97,38.15 U$4.22
  Bottom 0.305: v38,34.49 23.16,34.49 10.57,47.09 RL6.1 | v45.72,31.65 46.74,32.66 v49.38,32.66
VUSB  (via drill 0.3)
  Top 0.305: v53.65,51.97 53.65,48.11 U$4.7 | v14.83,46.08 11.79,49.12 11.79,51.36 11.68,51.46 | 11.68,51.46 11.58,51.56 8.13,51.56 X4.1 | v28.04,53.19 26.21,55.02 26.21,56.84 25.2,57.86 17.07,57.86 17.07,56.84 11.79,51.56 11.68,51.46
  Bottom 0.305: v53.65,51.97 52.22,53.39 35.15,53.39 34.34,52.58 C7.2 34.14,52.58 33.53,53.19 v28.04,53.19 | v14.83,46.08 23.57,37.34 26.62,37.34 26.62,39.37 25.2,40.79 D4.A
XTAL1  (via drill 0.3)
  Top 0.305: v46.13,43.43 46.13,43.03 48.77,43.03 U$4.16 | v44.91,43.43 43.28,43.43 R13.1 43.08,43.64 39.42,43.64 39.42,44.65 X3.P$1 39.22,44.65 35.76,44.65 C2.2
  Bottom 0.305: v44.91,43.43 v46.13,43.43

## Text on the board
tNames: BioReactor | Control Board v2 | 1 | 1 | w5100
bNames: USB | TX/RX | LINKLED
203bmp: C:/Users/G/Pictures/logo_epfl.bmp